# Altium PCB koosh_sensor_top_v1_0.PcbDoc
Units mil, origin at the board's own origin, x right, y up, seen from the top; angles counter-clockwise.
Board outline 600 x 600 mil, 2 copper layers (Top Layer, Bottom Layer), stack 21.022 mil thick; 23 components, 17 nets, 73 pads, 16 vias.
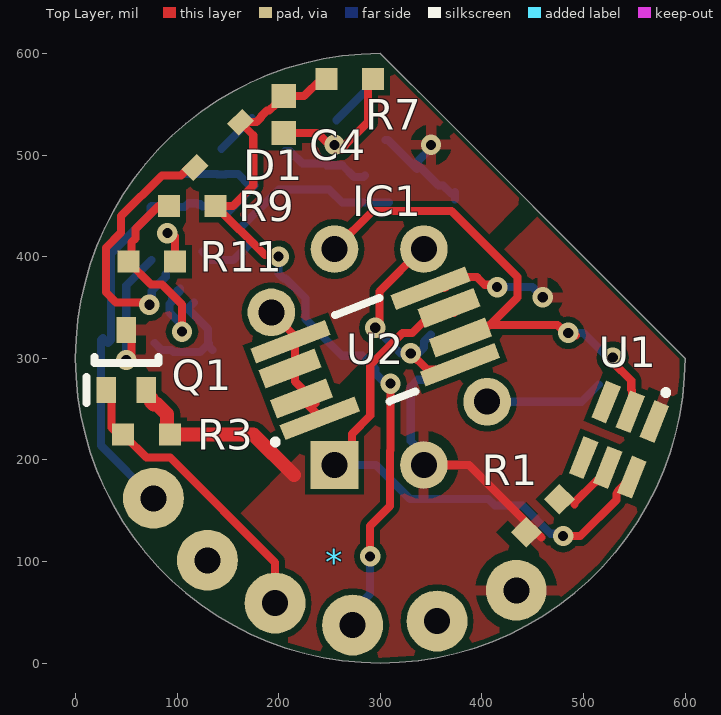
[diagram p0: Top Layer view]
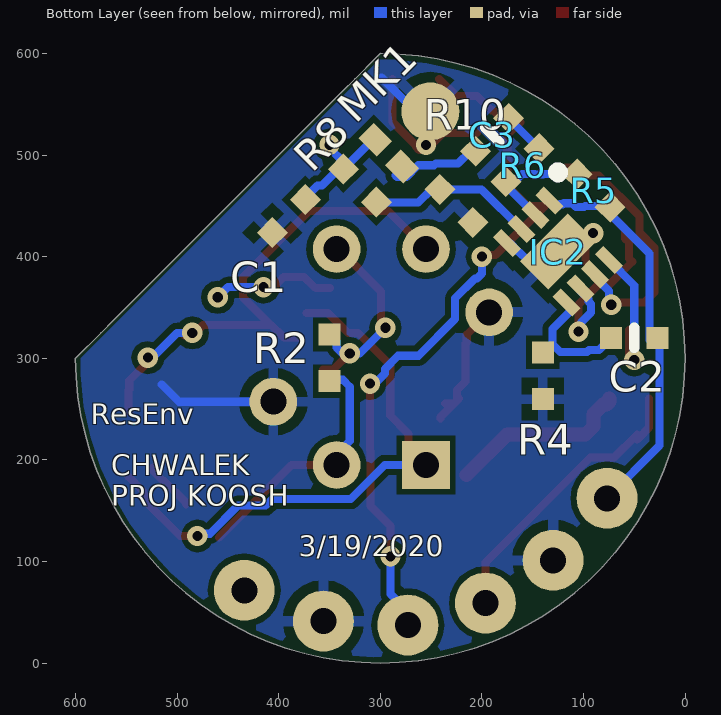
[diagram p1: Bottom Layer view, seen from below]
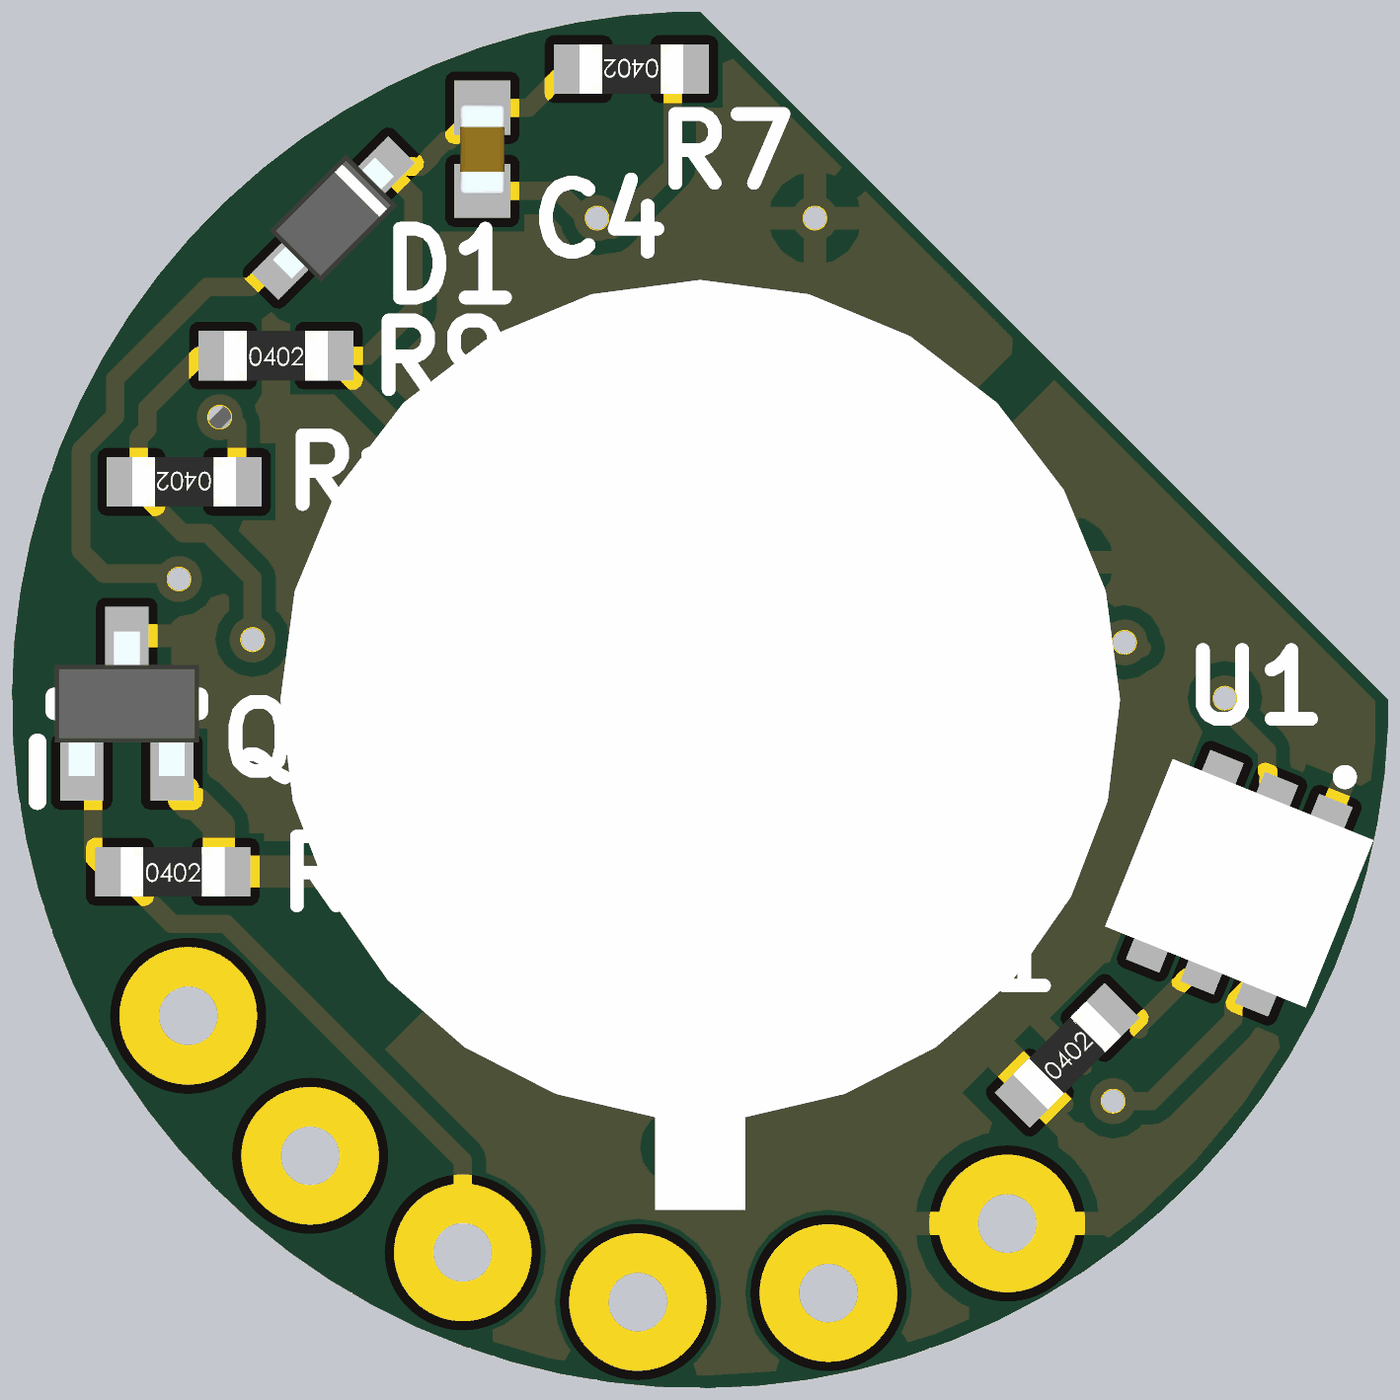
[diagram p2: 3D render of the assembled board from above, using the file's embedded part models]
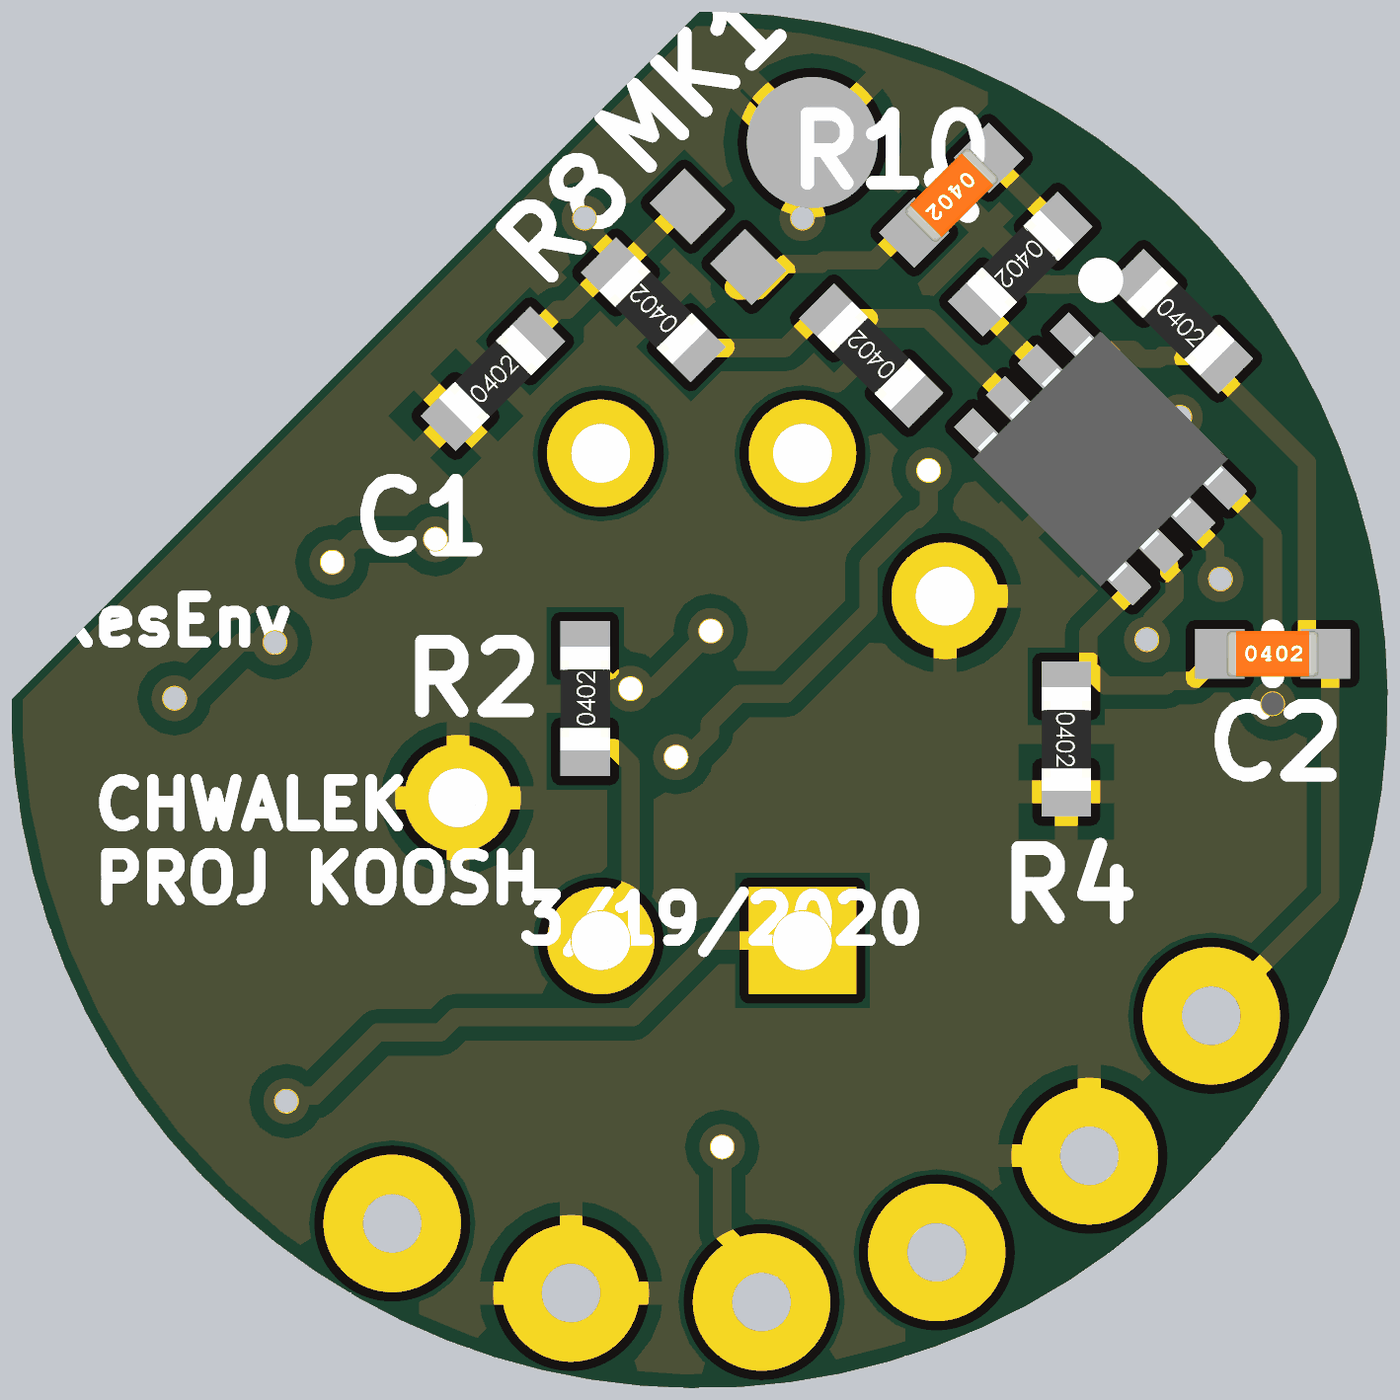
[diagram p3: 3D render of the assembled board from below, using the file's embedded part models]

## Layer stack, top to bottom
Top Solder: solder mask 0.394, Solder Resist, Dk 3.5
Top Layer: signal copper 1.417
Dielectric 2: prepreg 2.795, PP-006, Dk 4.1
Dielectric 1: dielectric 12.598, FR-4, Dk 4.8
Dielectric 3: prepreg 2.795, PP-006, Dk 4.1
Bottom Layer: signal copper 1.417
Bottom Solder: solder mask 0.394, Solder Resist, Dk 3.5

## Board outline
600,300 cw(c300,300) 300,600 303.16,596.84 325,575 337.5,562.5 562.5,337.5 575,325

## Design rules (kind name [scope] priority, off if disabled: settings)
Clearance [All] p1: gap=6 ignorepadtopadclearanceinfootprint=FALSE except(0: Arc-Hole Track-Hole SMDPad-Hole THPad-Hole Via-Hole Fill-Hole Poly-Hole Region-Hole Text-Hole)
PlaneConnect PWR [InNet('GND') or InNet('3.3V') or InNet('VBAT')] p1: planeconnectstyle=Relief reliefexpansion=20 reliefentries=4 reliefconductorwidth=10 reliefairgap=10
PlaneConnect [All] p2: planeconnectstyle=Relief reliefexpansion=20 reliefentries=4 reliefconductorwidth=10 reliefairgap=10
PolygonConnect [All] p1: connectstyle=Relief reliefconductorwidth=10 reliefentries=4 polygonreliefangle="90 Angle" airgapwidth=10
RoutingVias [All] p1: holewidth=10 width=20 viastyle="Through Hole" minholewidth=10 minwidth=20 maxholewidth=10 maxwidth=20
SolderMaskExpansion [All] p1: expansion=4 istentingtop=FALSE
Width [All] p1: maxlimit=8 minlimit=5 preferedwidth=6 minimp=50.000000 maximp=50.000000 favimp=50.000000
29 further rules are at their usual default settings.

## Classes and differential pairs
component class koosh_sensor_top: * C1 C2 C3 C4 D1 IC1 IC2 MK1 Q1 R1 R2 R3 R6 R7 R8 R9 R10 R11 U1 U2

## Components (designator, comment, footprint, x,y, rotation, side; value= is the part's Value field where it differs from the comment)
* "KooshTopSensorConn" KOOSHTOPBOARDCONN 301.97,301.97 r0 top
C1 "1µF" SMD-0402-RES 390,440 r225 bottom
C2 "4.7µF" SMD-0402C 50,320 r270 bottom
C3 "4.7µF" SMD-0402C 190,520 r45 bottom
C4 "10µF" CAPC1005X55N 205,540 r270 top
D1 "1N4148X-TP" SODFL1608X70N 140,510 r225 top
IC1 "TPIS_1T_1084" TPIS1T1084 300,300 r90 top
IC2 "TLV9062IDSGT" SON50P200X200X80-9N 125,405 r225 bottom
MK1 "SPV1840LR5H-B" *MIC_SPV1840LR5H-B 250.72,542.96 r45 bottom
Q1 "RE1C002ZPTL" SOTFL50P160X85-3N 50,298.25 r90 top
R1 "10k" SMD-0402-RES 460,145 r315 top
R2 "10k" SMD-0402-RES 349.75,300.48 r180 bottom
R3 "1M" SMD-0402-RES 70,225 r270 top
R4 "4.7k" SMD-0402-RES 140,282.83 r0 bottom
R5 "100k" SMD-0402-RES 90,465 r315 bottom
R6 "4.7k" SMD-0402-RES 160,490 r45 bottom
R7 "100k" SMD-0402-RES 270,575 r90 top
R8 "100k" SMD-0402-RES 320,470 r135 bottom
R9 "100k" SMD-0402-RES 115,450 r270 top
R10 "100k" SMD-0402-RES 225,450 r135 bottom
R11 "51.1k" SMD-0402-RES 75,395 r90 top
U1 "TCS34725FN" FN_1 535,220 r248 top
U2 "TPIS_1S_1385" TPIS_1S_1385 295,305 r291 top

## Footprints (in the part's own frame and the unit in brackets; to place one, negate y for a bottom-side part, rotate by r counter-clockwise, add the part's x,y. Pads: shape width x height; smd on the part's side, far side on the other; paste and mask are expansions set on the pad)
*MIC_SPV1840LR5H-B [mm]
  rect 0.65x0.545 smd: 1(0.473,1.477) 2(-0.474,1.476)
  round 1.45 smd: 3(0,0)
CAPC1005X55N [mm]
  rect 0.6x0.62 smd: 1(-0.46,0) 2(0.46,0)
  body extent -0.5,-0.25 0.5,0.25, height 0.55
FN_1 [mm]
  rect 1x0.4 smd: 1(-0.75,0.65) 2(-0.75,0) 3(-0.75,-0.65) 4(0.75,-0.65) 5(0.75,0) 6(0.75,0.65)
  silkscreen extent -1.56,0.61 -1.49,0.68, body extent -1,-1.2 1,1.2, height 0.65
KOOSHTOPBOARDCONN [mm]
  round 1.524 hole 0.65: 1(-5.72,-3.55) 2(-4.37,-5.1) 3(-2.68,-6.17) 4(-0.74,-6.72) 5(1.37,-6.62) 6(3.35,-5.85)
SMD-0402-RES [mm]
  rect 0.55x0.55 smd: 1(0,0.584) 2(0,-0.584)
  body extent -0.27,-0.57 0.28,0.58, height 0.41
SMD-0402C [mm]
  rect 0.55x0.55 smd: 1(0,0.584) 2(0,-0.584)
  silkscreen extent -0.25,0 0.25,0, body extent -0.25,-0.51 0.25,0.51, height 0.51
SODFL1608X70N [mm]
  rect 0.54x0.42 smd: 1(-0.8,0) 2(0.8,0)
  body extent -0.8,-0.4 0.8,0.4, height 0.7
SON50P200X200X80-9N [mm]
  rect 0.7x0.3 smd: 1(-1.05,0.75) 2(-1.05,0.25) 3(-1.05,-0.25) 4(-1.05,-0.75) 5(1.05,-0.75) 6(1.05,-0.25) 7(1.05,0.25) 8(1.05,0.75)
  rect 1x1.7 smd: 9(0,0)
  silkscreen extent -1.52,1.28 -1.28,1.52, body extent -1.05,-1 1.05,1, height 0.8
SOTFL50P160X85-3N [mm]
  rect 0.645x0.48 smd: 1(-0.752,0.5) 2(-0.752,-0.5) 3(0.752,0)
  silkscreen extent -1.07,-0.8 0.08,0.99, body extent -0.8,-0.8 0.8,0.8, height 0.85
TPIS1T1084 [mm]
  rect 1.192x1.192 hole 0.65: 1(-2.667,1.143)
  round 1.192 hole 0.65: 2(-2.667,-1.091) 3(-1.087,-2.672) 4(2.729,-1.091) 5(2.729,1.143) 6(1.148,2.723)
  body extent -5.65,-4.65 4.65,4.65, height 8.35
TPIS_1S_1385 [mm]
  rect 0.4x2 smd: 1(1.025,-1.875) 4(-1.025,-1.875) 5(-1.025,1.875) 8(1.025,1.875)
  rect 0.5x1.5 smd: 2(0.4,-2.125) 3(-0.4,-2.125) 6(-0.4,2.125) 7(0.4,2.125)
  silkscreen extent -1.25,-3.16 1.25,0.6

## Part data
C1: library part GCM155C71A105KE38D, "CAP CER 1UF 10V X7S 0402", Digi-Key Part Number=490-13409-1-ND, Manufacturer="Murata Electronics North America", Operating Temperature="-55°C ~ 125°C", Package / Case="0402 (1005 Metric)", Ratings=AEC-Q200, Temperature Coefficient=X7S, Tolerance=±10%, Voltage=10V, @ qty=0, Applications=Automotive, Datasheets=http://www.murata.com/~/media/webrenewal/support/library/catalog/products/capacitor/mlcc/c03e.ashx, Factory Stock=0, Features=-, Height - Seated (Max)=-, Image=//media.digikey.com/Renders/Murata%20Renders/ZRB-SERIES-0402.jpg, Lead Spacing=-, Lead Style=-, Minimum Quantity=1, Mounting Type="Surface Mount, MLCC", Packaging="Cut Tape (CT)", Part Number=GCM155C71A105KE38D, Part Status=Active, Quantity Available=7240, Series=GCM, Size / Dimension="0.039\" L x 0.020\" W (1.00mm x 0.50mm)", Thickness (Max)="0.022\" (0.55mm)", Unit Price (USD)=0.12
C2 C3: library part GRM155R60J475ME47D, "CAP CER 4.7UF 6.3V X5R 0402", Digi-Key Part Number=490-5915-1-ND, Manufacturer="Murata Electronics North America", Operating Temperature="-55°C ~ 85°C", Package / Case="0402 (1005 Metric)", Ratings=-, Temperature Coefficient=X5R, Tolerance=±20%, Voltage=6.3V, @ qty=0, Applications="General Purpose", Datasheets=http://www.murata.com/~/media/webrenewal/support/library/catalog/products/capacitor/mlcc/c02e.pdf, Factory Stock=0, Features="Derating Recommended", Height - Seated (Max)=-, Image=//media.digikey.com/Renders/Murata%20Renders/ZRB-SERIES-0402.jpg, Lead Spacing=-, Lead Style=-, Minimum Quantity=1, Mounting Type="Surface Mount, MLCC", Packaging="Cut Tape (CT)", Part Number=GRM155R60J475ME47D, Part Status=Active, Quantity Available=1963747, Series=GRM, Size / Dimension="0.039\" L x 0.020\" W (1.00mm x 0.50mm)", Thickness (Max)="0.024\" (0.60mm)", Unit Price (USD)=0.14
C4: library part GCM155R71C104KA55D, "CAP CER 10UF 16V X7R 0402", Digi-Key Part Number=490-4759-1-ND, Manufacturer="Murata Electronics North America", Operating Temperature="-55°C ~ 125°C", Package / Case="0402 (1005 Metric)", Ratings=AEC-Q200, Temperature Coefficient=X7R, Tolerance=±10%, Voltage=16V, @ qty=0, Applications=Automotive, Datasheets=http://www.murata.com/~/media/webrenewal/support/library/catalog/products/capacitor/mlcc/c03e.ashx, Factory Stock=0, Features=-, Height - Seated (Max)=-, Image=//media.digikey.com/Renders/Murata%20Renders/ZRB-SERIES-0402.jpg, Lead Spacing=-, Lead Style=-, Minimum Quantity=1, Mounting Type="Surface Mount, MLCC", Packaging="Cut Tape (CT)", Part Number=GCM155R71C104KA55D, Part Status=Active, Quantity Available=734194, Series=GCM, Size / Dimension="0.039\" L x 0.020\" W (1.00mm x 0.50mm)", Thickness (Max)="0.022\" (0.55mm)", Unit Price (USD)=0.1
D1: "Diode", Manufacturer_Name="Micro Commercial Components (MCC)", Mouser Part Number=833-1N4148X-TP, Datasheet Link=http://www.mouser.com/ds/2/258/1N4148X(SOD-523)-349105.pdf, Height=0.7mm, Manufacturer_Part_Number=1N4148X-TP, Mouser Price/Stock=https://www.mouser.com/Search/Refine.aspx?Keyword=833-1N4148X-TP
IC1: "Integrated Circuit", Manufacturer_Name="Excelitas Technologies", Manufacturer_Part_Number="TPIS 1T 1084", Datasheet Link=http://www.excelitas.com/Downloads/IR_Innovations_Brochure.pdf, Height=4.5mm
IC2: "Integrated Circuit", Manufacturer_Name="Texas Instruments", Mouser Part Number=595-TLV9062IDSGT, Datasheet Link=http://www.ti.com/lit/gpn/TLV9062, Height=0.8mm, Manufacturer_Part_Number=TLV9062IDSGT, Mouser Price/Stock=https://www.mouser.com/Search/Refine.aspx?Keyword=595-TLV9062IDSGT
MK1: "Mic Mems Analog", Package="0805 Knowles", Availability=Unavailable, MF=Knowles, MP=SPV1840LR5H-B, Price=None, SnapEDA_Link=https://www.snapeda.com/parts/SPV1840LR5H-B/Knowles/view-part/?ref=snap
Q1: "MOSFET (P-Channel)", Manufacturer_Name="ROHM Semiconductor", Mouser Part Number=755-RE1C002ZPTL, RS Part Number=1486960P, Datasheet Link=https://componentsearchengine.com/Datasheets/1/RE1C002ZPTL.pdf, Height=0.85mm, Manufacturer_Part_Number=RE1C002ZPTL, Mouser Price/Stock=https://www.mouser.com/Search/Refine.aspx?Keyword=755-RE1C002ZPTL, RS Price/Stock=http://uk.rs-online.com/web/p/products/1486960P
R1 R2: library part ERJ-2GEJ103X, "RES SMD 10K OHM 5% 1/10W 0402", Digi-Key Part Number=P10KJCT-ND, Manufacturer="Panasonic Electronic Components", Operating Temperature="-55°C ~ 155°C", Package / Case="0402 (1005 Metric)", Power (Watts)="0.1W, 1/10W", Supplier Device Package=0402, Temperature Coefficient=±200ppm/°C, Tolerance=±5%, @ qty=1500, Composition="Thick Film", Datasheets=http://industrial.panasonic.com/www-cgi/jvcr13pz.cgi?E+PZ+3+AOA0001+ERJ2GEJ103X+7+WW, Factory Stock=0, Failure Rate=-, Features="Automotive AEC-Q200", Height - Seated (Max)="0.016\" (0.40mm)", Image=//media.digikey.com/Photos/Panasonic%20Photos/ERJ-PA2-Series.jpg, Minimum Quantity=1, Number of Terminations=2, Packaging="Cut Tape (CT)", Part Number=ERJ-2GEJ103X, Part Status=Active, Quantity Available=2560215, Series=ERJ, Size / Dimension="0.039\" L x 0.020\" W (1.00mm x 0.50mm)", Unit Price (USD)=0.00350
R3: library part ERJ-2GEJ105X, "RES SMD 1M OHM 5% 1/10W 0402", Digi-Key Part Number=P1.0MJCT-ND, Manufacturer="Panasonic Electronic Components", Operating Temperature="-55°C ~ 155°C", Package / Case="0402 (1005 Metric)", Power (Watts)="0.1W, 1/10W", Supplier Device Package=0402, Temperature Coefficient=±200ppm/°C, Tolerance=±5%, @ qty=1500, Composition="Thick Film", Datasheets=http://industrial.panasonic.com/www-cgi/jvcr13pz.cgi?E+PZ+3+AOA0001+ERJ2GEJ105X+7+WW, Factory Stock=0, Failure Rate=-, Features="Automotive AEC-Q200", Height - Seated (Max)="0.016\" (0.40mm)", Image=//media.digikey.com/Photos/Panasonic%20Photos/ERJ-PA2-Series.jpg, Minimum Quantity=1, Number of Terminations=2, Packaging="Cut Tape (CT)", Part Number=ERJ-2GEJ105X, Part Status=Active, Quantity Available=1082572, Series=ERJ, Size / Dimension="0.039\" L x 0.020\" W (1.00mm x 0.50mm)", Unit Price (USD)=0.00350
R4 R6: library part ERJ-2GEJ103X, "RES SMD 4.7K OHM 5% 1/10W 0402", Digi-Key Part Number=P10KJCT-ND, Manufacturer="Panasonic Electronic Components", Operating Temperature="-55°C ~ 155°C", Package / Case="0402 (1005 Metric)", Power (Watts)="0.1W, 1/10W", Supplier Device Package=0402, Temperature Coefficient=±200ppm/°C, Tolerance=±5%, @ qty=1500, Composition="Thick Film", Datasheets=http://industrial.panasonic.com/www-cgi/jvcr13pz.cgi?E+PZ+3+AOA0001+ERJ2GEJ103X+7+WW, Factory Stock=0, Failure Rate=-, Features="Automotive AEC-Q200", Height - Seated (Max)="0.016\" (0.40mm)", Image=//media.digikey.com/Photos/Panasonic%20Photos/ERJ-PA2-Series.jpg, Minimum Quantity=1, Number of Terminations=2, Packaging="Cut Tape (CT)", Part Number=ERJ-2GEJ103X, Part Status=Active, Quantity Available=2560215, Series=ERJ, Size / Dimension="0.039\" L x 0.020\" W (1.00mm x 0.50mm)", Unit Price (USD)=0.00350
R5 R7 R8 R9 R10: library part ERJ-2GEJ103X, "RES SMD 100K OHM 5% 1/10W 0402", Digi-Key Part Number=P10KJCT-ND, Manufacturer="Panasonic Electronic Components", Operating Temperature="-55°C ~ 155°C", Package / Case="0402 (1005 Metric)", Power (Watts)="0.1W, 1/10W", Supplier Device Package=0402, Temperature Coefficient=±200ppm/°C, Tolerance=±5%, @ qty=1500, Composition="Thick Film", Datasheets=http://industrial.panasonic.com/www-cgi/jvcr13pz.cgi?E+PZ+3+AOA0001+ERJ2GEJ103X+7+WW, Factory Stock=0, Failure Rate=-, Features="Automotive AEC-Q200", Height - Seated (Max)="0.016\" (0.40mm)", Image=//media.digikey.com/Photos/Panasonic%20Photos/ERJ-PA2-Series.jpg, Minimum Quantity=1, Number of Terminations=2, Packaging="Cut Tape (CT)", Part Number=ERJ-2GEJ103X, Part Status=Active, Quantity Available=2560215, Series=ERJ, Size / Dimension="0.039\" L x 0.020\" W (1.00mm x 0.50mm)", Unit Price (USD)=0.00350
R11: library part ERJ-2GEJ103X, "RES SMD 51.1K OHM 5% 1/10W 0402", Digi-Key Part Number=P10KJCT-ND, Manufacturer="Panasonic Electronic Components", Operating Temperature="-55°C ~ 155°C", Package / Case="0402 (1005 Metric)", Power (Watts)="0.1W, 1/10W", Supplier Device Package=0402, Temperature Coefficient=±200ppm/°C, Tolerance=±5%, @ qty=1500, Composition="Thick Film", Datasheets=http://industrial.panasonic.com/www-cgi/jvcr13pz.cgi?E+PZ+3+AOA0001+ERJ2GEJ103X+7+WW, Factory Stock=0, Failure Rate=-, Features="Automotive AEC-Q200", Height - Seated (Max)="0.016\" (0.40mm)", Image=//media.digikey.com/Photos/Panasonic%20Photos/ERJ-PA2-Series.jpg, Minimum Quantity=1, Number of Terminations=2, Packaging="Cut Tape (CT)", Part Number=ERJ-2GEJ103X, Part Status=Active, Quantity Available=2560215, Series=ERJ, Size / Dimension="0.039\" L x 0.020\" W (1.00mm x 0.50mm)", Unit Price (USD)=0.00350
U1: "Undefined or Miscellaneous", Manufacturer_Name=ams, Mouser Part Number=985-TCS34725FN, RS Part Number=1024173P, Datasheet Link=https://ams.com/jpn/content/download/319364/1117183/file/TCS3472_Datasheet_EN_v2.pdf, Manufacturer_Part_Number=TCS34725FN, Mouser Price/Stock=https://www.mouser.com/Search/Refine.aspx?Keyword=985-TCS34725FN, RS Price/Stock=http://china.rs-online.com/web/p/products/1024173P
U2: "Undefined or Miscellaneous", Manufacturer_Name="Excelitas Technologies", Manufacturer_Part_Number="TPIS 1S 1385", Datasheet Link=http://media.digikey.com/pdf/Data%20Sheets/Excelitas%20PDFs/TPiS_1S_1385.pdf

## Via types
v1: diameter 20, hole 10, Top Layer to Bottom Layer, tented both sides, 16 vias

## Nets (pads, with @x,y where several pads share a name; then routed paths per layer and width w, separated by ;. In a path a pad name is that pad's centre, name@x,y a point inside that pad or via, vN(x,y) a via of type N, cw(c..) or ccw(c..) an arc to the next point about the centre after c; other vN are vias at no path point)
3.3V: *.6 IC1.2 Q1.2 R1.2 R2.2 R3.1 U1.1 U2.5 | length 564.3
  Top Layer w8: U2.5 362.75,369.13 364.99,369.99 375,380 395.1,380 397.44,377.66 402.8,372.3 412.7,372.3 v1(415,370) ; IC1.2@350.4,187.55 IC1.2 387.47,195 458.74,123.74
  Top Layer w14: Q1.2@74.69,260.39 74.69,257.15 77.13,254.7 80.38,254.7 90.18,244.9 90.18,232.82 98,225 175,225 215,185
  Bottom Layer w8: IC1.2 342.95,205.53 330,218.49 330,272 336.82,278.82 R2.2@349.58,278.82 ; v1(415,370) 449.94,370 459.94,360 v1(460,360)
3.3V_MIC: C1.1 IC2.8 MK1.1 Q1.3 R8.1 | length 265
  Top Layer w8: v1@55,298.25 Q1.3@55,327.72
  Bottom Layer w8: v1(50,298.25) 50,371.76 IC2.8 ; MK1.1 307.53,515 R8.1 336.26,493.02 350,506.75 v1(350,510) ; R8.1@338.75,488.75 357.49,470 361.82,470 369.82,462 372,462 373.74,463.74 C1.1
GND: *.2 *.5 C1.2 C4.2 IC1.3 IC1.6 IC2.4 IC2.9 MK1.3 R4.1 R7.2 R10.2 R11.2 U2.1 U2.2 U2.3 U2.4 | length 559.1
  Top Layer w8: v1@90,428.12 98,420.12 R11.2 ; v1(90.48,423.17) v1@90.48,427.64 ; IC1.6 214.86,323.13 214.86,315.81 216.25,314.42 216.25,277.22 224.53,268.95 U2.2@224.53,258.33 ; C4.2 238.11,521.89 255.07,504.93 261.68,504.93 264.93,508.18 264.93,509.52 288,532.59 R7.2@288,575 ; U2.2 U2.2@224.53,258.33 ; U2.2@235.99,255.32 U2.2@227.54,255.32 ; U2.1 240.55,242.31 U2.2@227.54,255.32 ; IC1.3 IC1.3@406.36,258.37 ; U2.2@224.53,258.33 U2.2@227.54,255.32
  Bottom Layer w8: IC2.9 133.18,396.82 155.36,396.82 163.27,404.74 163.8,404.74 172.42,413.35 IC2.4 ; MK1.3@257.1,534.27 257.1,534.63 298.74,576.26 ; IC1.3 498.06,257.2 515.05,274.2
  other v1: 255,510
I2C1_SCL: IC1.5 U1.2 U2.7 | length 527.1
  Top Layer w8: IC1.5 292.56,445 370,445 380,435 435,380 435,359.92 407.85,332.77 ; U2.7 394.78,320.28 407.27,332.77 407.85,332.77 ; v1@485,322.57 492.57,322.57 490.14,325 482.08,325 474.31,332.77 407.85,332.77 ; v1(528.76,300.66) 528.76,296.24 547.01,277.99 547.01,269.27 547.79,268.48 547.79,248.16 U1.2@547.01,247.38
  Bottom Layer w8: v1(485,325) 500,325 524.34,300.66 v1(528.76,300.66)
I2C1_SDA: IC1.1 U1.6 U2.6 | length 566.1
  Top Layer w8: IC1.1 272.27,212.27 272.27,225.63 290.12,243.49 290.12,293.23 321.72,324.83 331.48,324.83 351.34,344.68 U2.6@372.46,344.68 ; v1(480,125) 496.83,125 532.37,160.54 532.37,165.79 533.82,169.37 547.49,183.04 U1.6
  Bottom Layer w8: IC1.1 295.63,195 329.09,161.54 406.28,161.54 412.81,155 440,155 467.7,127.3 477.7,127.3 v1(480,125)
LIGHT_INT: R1.1 U1.5 | length 50.5
  Top Layer w8: 491.26,156.26 491.26,157.99 512.25,178.98 513.26,178.98 523.94,189.65 U1.5
MIC_EN: *.3 Q1.1 R3.2 | length 286.9
  Top Layer w8: Q1.1@35.31,260.39 35.31,231.69 44.5,222.5 R3.2@47,220 ; R3.2 49.5,222.5 69.8,202.2 93.34,202.2 196.46,99.09 *.3
MIC_ENV: *.4 C4.1 D1.1 R7.1 R9.1 | length 734.2
  Top Layer w8: v1(200,400) 198.44,401.56 186.44,401.56 R9.1 155,450 175,470 175,519.54 D1.1 163.94,533.94 169.98,533.94 171.48,532.44 178.11,532.44 182.8,537.12 182.8,537.84 188.65,543.7 190.59,543.7 196.8,549.91 196.8,550.3 204.61,558.11 C4.1 225.11,558.11 R7.1@242,575 ; v1(290,105) 290,135 309.49,154.49 309.49,208.86 310.12,209.5 v1(310.12,275)
  Bottom Layer w8: v1(200,400) 200,383.35 204.69,378.66 206.66,378.66 226.26,359.06 226.26,338.74 262.5,302.5 282.5,302.5 295.39,289.61 295.39,284.93 305.32,275 v1(310.12,275) ; *.4 272.83,50.92 290,68.09 v1(290,105)
MIC_SIG: *.1 C2.1 IC2.1 R5.1 | length 396.9
  Bottom Layer w8: C2.1 25,318 25,213.98 *.1 ; C2.1@32,315 35,318 35,403.28 73.74,442.02 R5.1 75,450 98.28,450 99.55,448.74 107.27,448.74 111.11,452.58 119.4,452.58 120.45,451.53 123.1,451.53 125.09,449.54 127.78,449.54 IC2.1
NetC2_2: C2.2 IC2.5 R4.2 | length 118.7
  Bottom Layer w8: C2.2@78,315 84.83,308.17 94.61,308.17 96.54,306.25 122.81,306.25 R4.2@131.2,314.63 ; IC2.5 111.9,350.14 111.9,347.45 130.46,328.89 130.46,312.54 R4.2@135,308
NetC3_1: C3.1 MK1.2 | length 89.8
  Bottom Layer w8: C3.1 211.26,503.74 223.43,491.57 245.41,491.57 247.01,489.97 262.59,489.97 274.02,478.54 283.54,478.54 MK1.2@285,480
NetC3_2: C3.2 R6.2 | length 42.4
  Bottom Layer w8: R6.2 C3.2
NetD1_2: D1.2 IC2.7 | length 258.3
  Top Layer w8: v1(72.73,352.64) 70.43,354.93 66.21,354.93 66.14,355 40,355 30,365 30,408.8 45,423.8 45,440 85,480 103.96,480 111.69,487.73 D1.2
  Bottom Layer w8: v1(72.73,352.64) 75.02,354.93 75.02,366.25 88.81,380.03 IC2.7
NetIC2_2: IC2.2 R5.2 R6.1 | length 115.8
  Bottom Layer w8: R5.2 139.28,481.26 139.59,480.95 147.88,480.95 148.19,481.26 160.27,481.26 171.35,470.18 176.26,470.18 IC2.2
NetIC2_3: IC2.3 R8.2 R10.1 | length 169
  Bottom Layer w8: IC2.3 200.18,466.26 R10.1 249.73,466.26 262.63,453.37 R8.2@308.71,453.37
NetIC2_6: IC2.6 R9.2 R11.1 | length 231.2
  Top Layer w8: R9.2 81.72,450 59,427.28 59,418 55.14,414.14 55.14,398.14 R11.1 74.36,372.64 85.11,372.64 104.82,352.93 v1(104.82,326.25)
  Bottom Layer w8: IC2.6@100,365 100,366.08 IC2.6 102.73,366.11 95.17,358.56 95.17,355.91 92.73,353.46 92.73,345.18 102.53,335.38 102.53,328.54 v1(104.82,326.25)
TP_INT: IC1.4 R2.1 U2.8 | length 232.2
  Top Layer w8: v1(295,330) 295,328.1 299.18,323.91 299.18,365.82 340.81,407.44 IC1.4 ; v1(330,304.83) 330.2,304.83 346.25,288.78 U2.8@356.22,288.78
  Bottom Layer w8: v1(295,330) 320.17,304.83 v1(330,304.83) 333.01,304.83 335.04,302.79 342.92,310.68 342.92,316.65 R2.1 ; IC1.4@342.95,396.91 IC1.4
pads on no net: U1.3 U1.4

## Polygon pours and split planes (outlines as drawn)
3.3V_MIC on Top Layer "Top Layer-GND 1" (solid, remove dead copper, pour order 10): 85,100 85.48,100.52 431.99,447.02 438.87,453.91 439.52,454.5 299.57,594.44 ccw(c299.57,300.66)
3.3V on Top Layer "Top Layer-GND 1" (solid, remove dead copper, pour order 9): 100,85 454.3,439.3 594.44,299.57 cw(c300.66,299.57)
GND on Bottom Layer "Top Layer-GND 1" (solid, remove dead copper, pour order 1): 595,300 cw(c301.22,300) 301.22,593.78

## Silkscreen, mask and mechanical layers (free items; w line width, h text height)
Bottom Overlay:
  text "ResEnv" at 585,235 h20
  text "CHWALEK / PROJ KOOSH" at 565,155 h20
  text "3/19/2020" at 380,105 h20
Mechanical Board Shape:
  the board outline again, w3.94